# Altium PCB STM32Core.PcbDoc
Units mil, origin at the board's own origin, x right, y up, seen from the top; angles counter-clockwise.
Board outline 1090 x 1670 mil, 4 copper layers (Top1, Sign2, Gnd3, Bottom4), stack 42.312 mil thick; 69 components, 76 nets, 322 pads, 108 vias.
Unrouted connection lines stored in the file: 55.
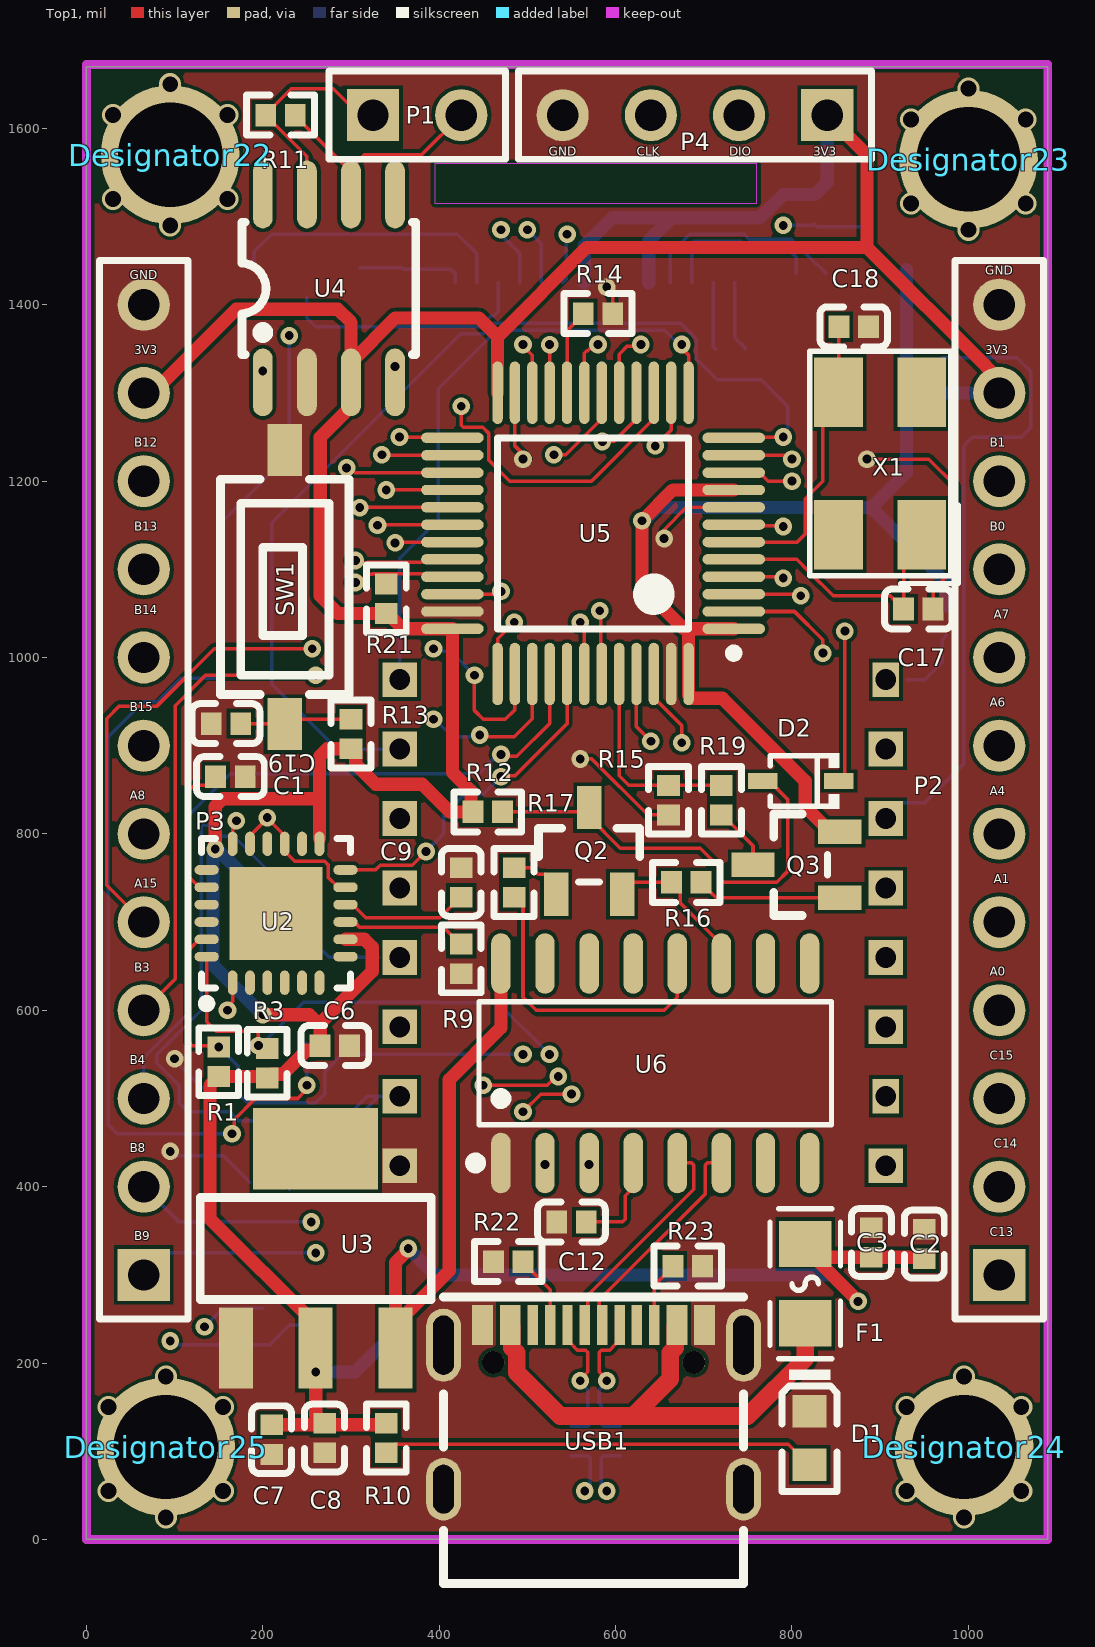
[diagram p0: Top1 view]
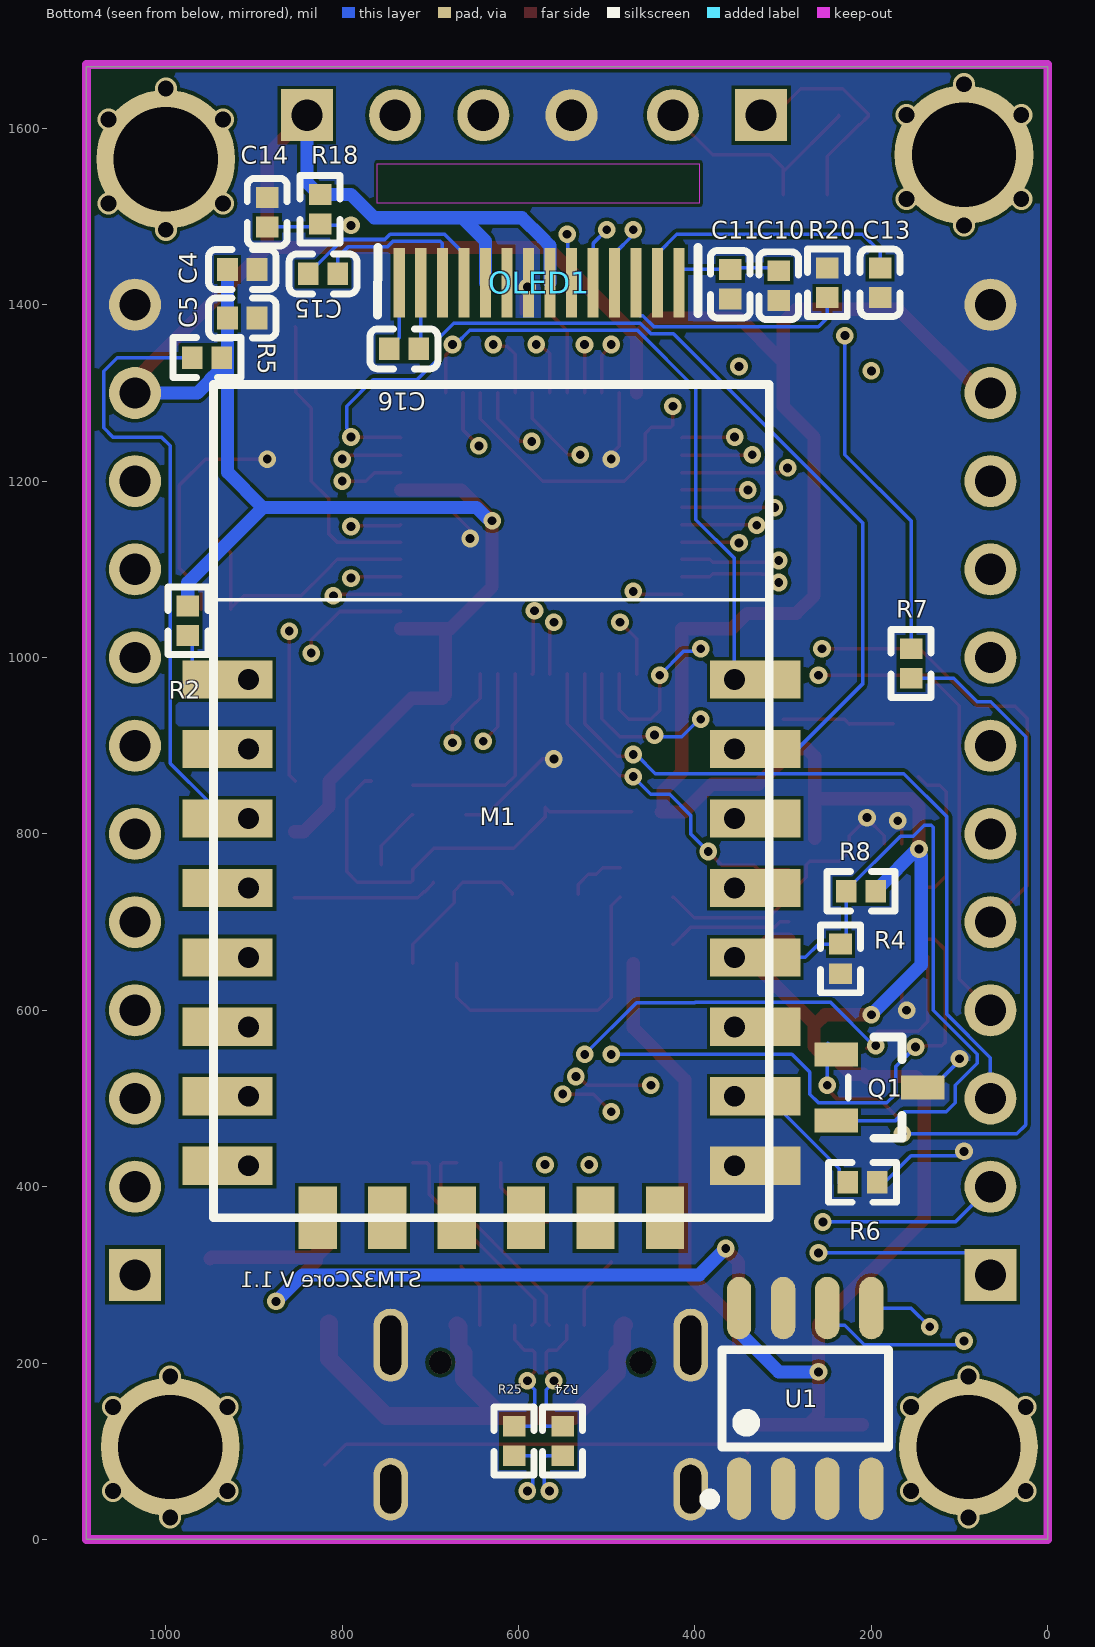
[diagram p1: Bottom4 view, seen from below]
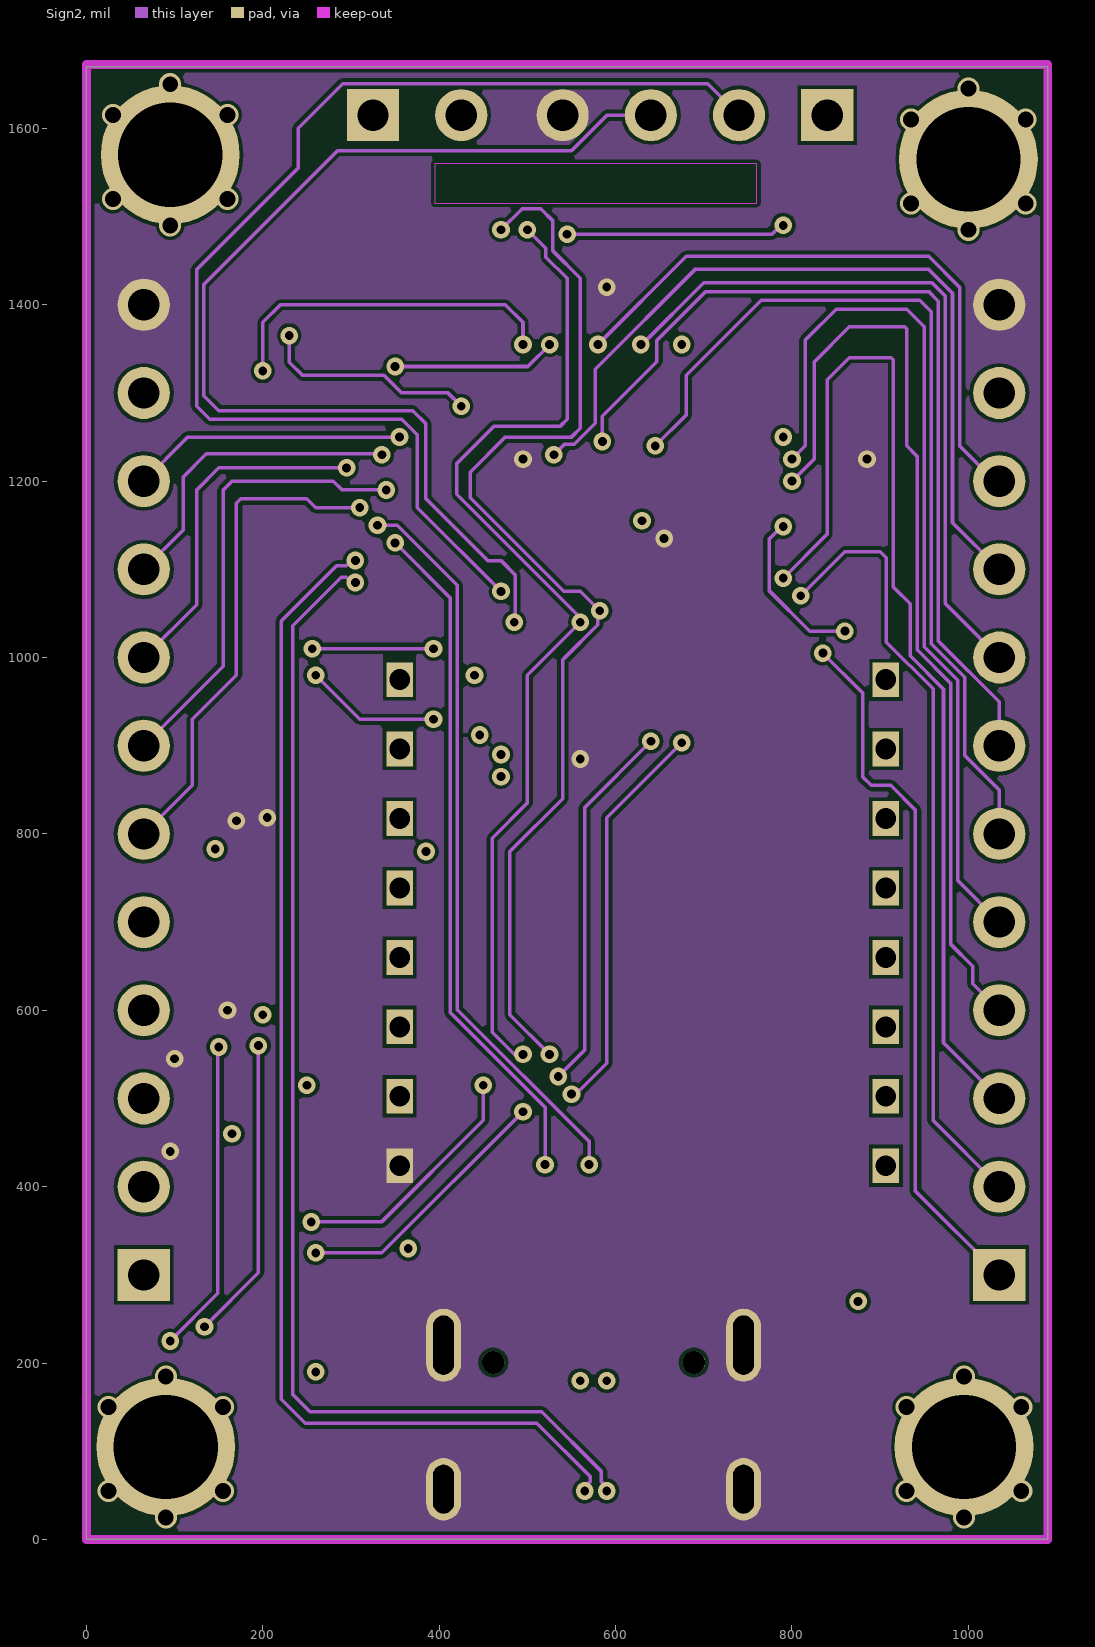
[diagram p2: Sign2]
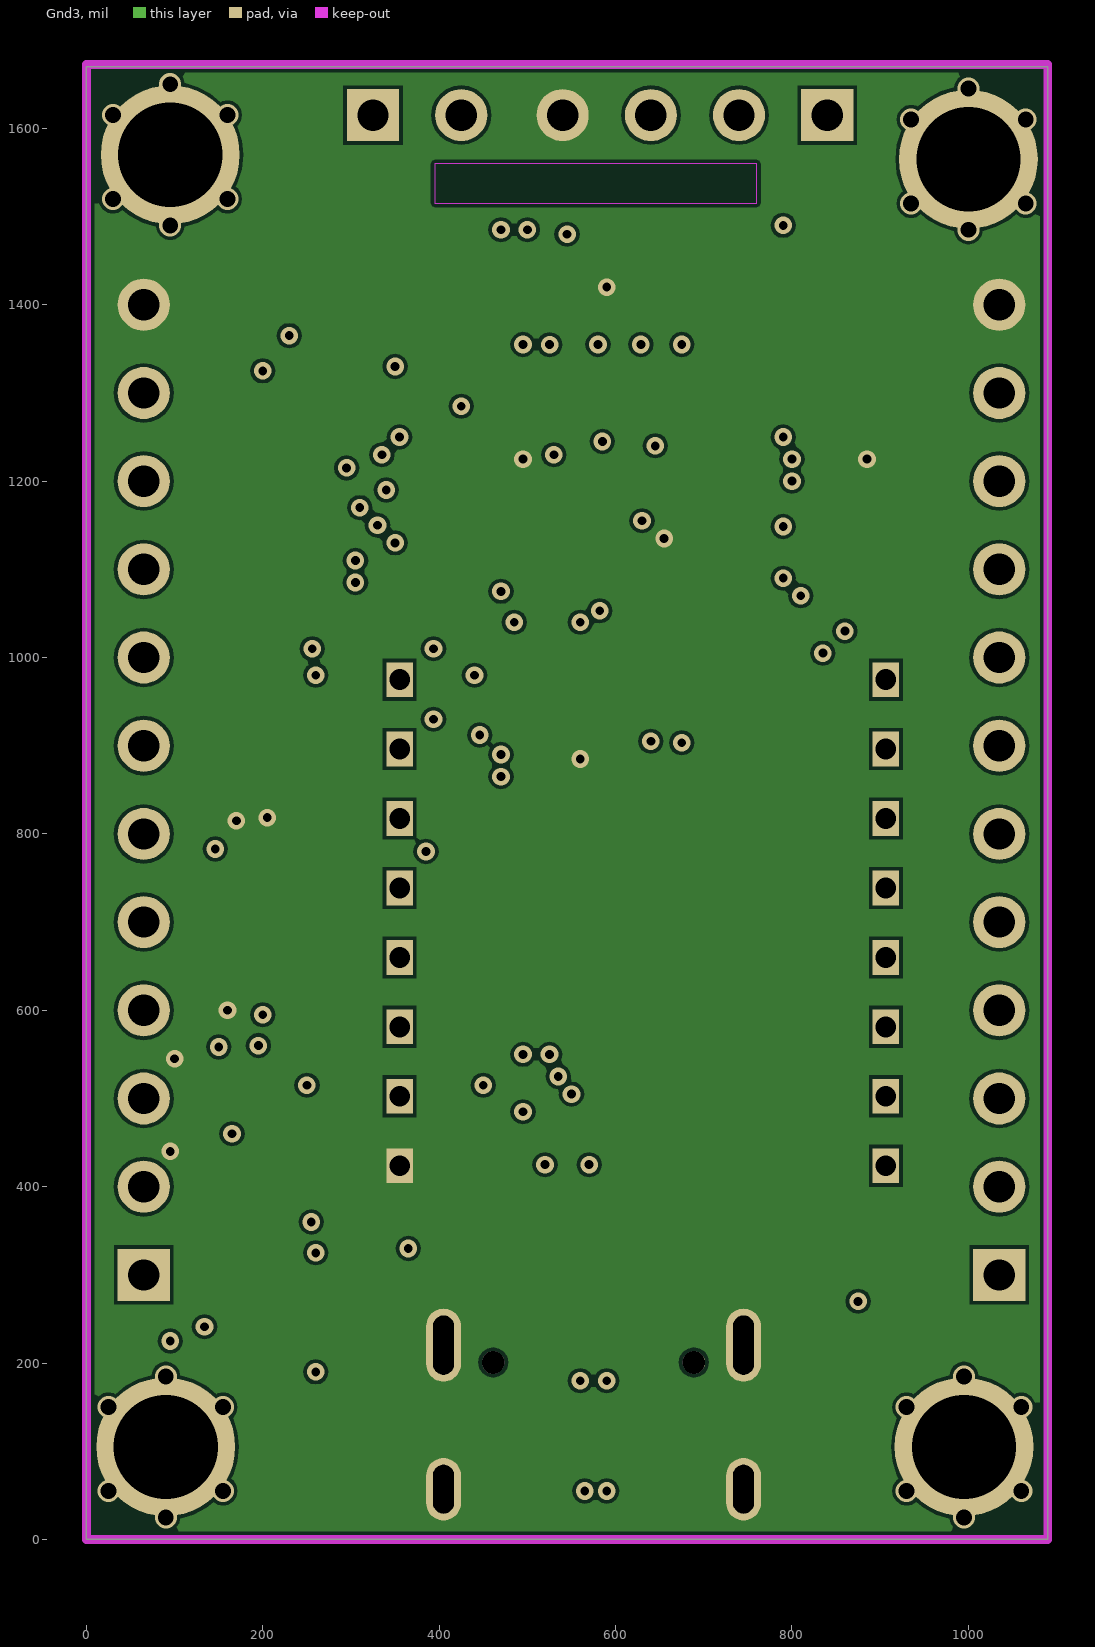
[diagram p3: Gnd3]

## Layer stack, top to bottom
Top Solder: solder mask 0.4, Solder Resist, Dk 3.5
Top1: signal copper 1.4
Dielectric 2: prepreg 12.252, PP-006, Dk 4.1
Sign2: signal copper 1.378
Dielectric 1: core 12.252, FR-4, Dk 4.2
Gnd3: signal copper 1.378
Dielectric 3: prepreg 12.252, PP-006, Dk 4.1
Bottom4: signal copper 1.4
Bottom Solder: solder mask 0.4, Solder Resist, Dk 3.5

## Board outline
0,0 0,1670 1090,1670 1090,0

## Design rules (kind name [scope] priority, off if disabled: settings)
Clearance [All] p1: gap=4 ignorepadtopadclearanceinfootprint=FALSE
ComponentClearance [All] p1: gap=0 collisioncheckmode=3 verticalgap=0 showdistances=FALSE
DiffPairsRouting [All] p1: maxlimit=9 minlimit=9 mostfreqgap=9 toplayer_minwidth=4 toplayer_maxwidth=4 toplayer_prefwidth=4 midlayer1_minwidth=4 midlayer1_maxwidth=4 midlayer1_prefwidth=4 midlayer2_minwidth=4 midlayer2_maxwidth=4 midlayer2_prefwidth=4 bottomlayer_minwidth=4 bottomlayer_maxwidth=4 bottomlayer_prefwidth=4 maxuncoupledlength=500
FanoutControl Fanout_BGA [All] p1: bgadir=Out bgaviamode=Centered fanoutstyle=Auto fanoutdirection=Alternating viagrid=1 // Fanout_BGA (Default Rule)
HoleSize [All] p1: absolutevalues=TRUE maxlimit=10000 minlimit=8 maxpercent=80.000 minpercent=20.000
MinimumSolderMaskSliver [All] p1 off: minsoldermaskwidth=2
PlaneClearance [All] p1: clearance=8
PlaneConnect [All] p1: planeconnectstyle=Direct reliefexpansion=20 reliefentries=4 reliefconductorwidth=10 reliefairgap=10
PolygonConnect [All] p1: connectstyle=Direct reliefconductorwidth=10 reliefentries=4 polygonreliefangle="90 Angle" airgapwidth=10
RoutingVias [All] p1: holewidth=8 width=16 viastyle="Through Hole" minholewidth=6 minwidth=12 maxholewidth=28 maxwidth=50
SilkToSilkClearance [All] p1: silktosilkclearance=0
SilkToSolderMaskClearance [IsPad] p1: minsilkscreentomaskgap=0 clearancetoexposedcopper=TRUE
SolderMaskExpansion [All] p1: expansion=3 istentingtop=FALSE
Width [All] p1: maxlimit=10000 minlimit=4 preferedwidth=4
21 further rules are at their usual default settings.

## Classes and differential pairs
component class main: C1 C2 C3 C4 C5 C6 C7 C8 C9 C10 C11 C12 C13 C14 C15 C16 C17 C18 C19 D1 D2 F1 M1 OLED1 P1 P2 P3 P4 Q1 Q2 Q3 R1 R2 R3 R4 R5 R6 R7 R8 R9 R10 R11 R12 R13 R14 R15 R16 R17 R18 R19 R20 R21 R22 R23 R24 R25 SW1 U2 U3 U4 U5 U6 USB1 X1
differential pair STM32IN: +STM32IN_P -STM32IN_N
differential pair STM32: +STM32_P -STM32_N
differential pair USB: +USB_P -USB_N

## Components (designator, comment, footprint, x,y, rotation, side; value= is the part's Value field where it differs from the comment)
C1 "2.2nF (222) 10% 50V" 0402_C 163.27,865 r0 top
C2 "10uF (106) 20% 6.3V" 0402_C 950,335 r270 top
C3 "100nF (104) 10% 16V" 0402_C 890,336.73 r270 top
C4 "10uF (106) 20% 6.3V" 0402_C 913.27,1440 r0 bottom
C5 "100nF (104) 10% 16V" 0402_C 913.27,1385 r0 bottom
C6 "2.2nF (222) 10% 50V" 0402_C 281.73,560 r180 top
C7 "100nF (104) 10% 16V" 0402_C 210,113.27 r90 top
C8 "10uF (106) 20% 6.3V" 0402_C 270,115 r90 top
C9 "0.1uF (105) 10% 25V" 0402_C 425,745 r270 top
C10 "100nF (104) 10% 16V" 0402_C 305,1421.73 r270 bottom
C11 "4.7uF (475) 20% 10V" 0402_C 360,1423.27 r270 bottom
C12 "100nF (104) 10% 16V" 0402_C 550,360 r180 top
C13 "2.2nF (222) 10% 50V" 0402_C 190,1425 r90 bottom
C14 "4.7uF (475) 20% 10V" 0402_C 885,1505 r270 bottom
C15 "1.0uF (105) 10% 25V" 0402_C 821.73,1435 r180 bottom
C16 "1.0uF (105) 10% 25V" 0402_C 730,1350 r0 bottom
C17 "20pF (200) 5% 50V" 0402_C 943.27,1055 r180 top
C18 "20pF (200) 5% 50V" 0402_C 870,1375 r180 top
C19 "100nF (104) 10% 16V" 0402_C 158.27,925 r0 top
D1 "白灯 0603" 0603_LED_S1 820,115 r270 top
D2 "1N4148WS T4" SOD-323_L1.8-W1.3-LS2.5-RD 810,860 r180 top
Designator22 "Comment" 铜柱 95,1570 r0 top
Designator23 "Comment" 铜柱 1000,1565 r0 top
Designator24 "Comment" 铜柱 995,105 r0 top
Designator25 "Comment" 铜柱 90,105 r0 top
F1 "ASMD0805-050" ASMD0805 815,290 r90 top
M1 "ESP-12E&F Module" "ESP-12E&F Module" 630.79,669.84 r180 bottom
OLED1 "QG-2832TLBFG02" OLED-SMD_QG-9616TSWCG02 576.61,1425.01 r270 bottom
P1 "Header 2" HDR1X2 325,1615 r0 top
P2 "Header 12" HDR1X12 1035,300 r90 top
P3 "Header 12" HDR1X12 65,300 r90 top
P4 "Header 4" HDR1X4 840,1615 r180 top
Q1 "SS8050 Y1" SOT-23(SOT-23-3) 190.79,512.4 r0 bottom
Q2 "SS8050 Y1" SOT-23(SOT-23-3) 570,780.79 r270 top
Q3 "SS8550 Y2" SOT-23(SOT-23-3) 805,765 r0 top
R1 "4.7KΩ (4701) ±1%" 0402_R 150,541.73 r90 top
R2 "10KΩ (1002) ±1%" 0402_R 975,1041.73 r270 bottom
R3 "4.7KΩ (4701) ±1%" 0402_R 205,540 r270 top
R4 "10KΩ (1002) ±1%" 0402_R 211.73,735 r180 bottom
R5 "10KΩ (1002) ±1%" 0402_R 953.27,1340 r0 bottom
R6 "10KΩ (1002) ±1%" 0402_R 210,405 r180 bottom
R7 "1KΩ (1001) ±1%" 0402_R 155,993.27 r90 bottom
R8 "0Ω (0R0) ±1%" 0402_R 235,658.27 r90 bottom
R9 "4.7KΩ (4701) ±1%" 0402_R 425,658.27 r270 top
R10 "1KΩ (1001) ±1%" 0402_R 340,115 r270 top
R11 "120Ω (1200) ±1%" 0402_R 220,1615 r0 top
R12 "10KΩ (1002) ±1%" 0402_R 455,825 r180 top
R13 "10KΩ (1002) ±1%" 0402_R 300,913.27 r270 top
R14 "10KΩ (1002) ±1%" 0402_R 580,1390 r0 top
R15 "10KΩ (1002) ±1%" 0402_R 660,838.27 r270 top
R16 "1KΩ (1001) ±1%" 0402_R 680,745 r0 top
R17 "1KΩ (1001) ±1%" 0402_R 485,745 r90 top
R18 "4.7KΩ (4701) ±1%" 0402_R 825,1508.27 r90 bottom
R19 "1KΩ (1001) ±1%" 0402_R 720,838.27 r270 top
R20 "5.6KΩ (5601) ±1%" 0402_R 250,1425 r90 bottom
R21 "1.5KΩ (1501) ±1%" 0402_R 340,1066.73 r90 top
R22 "5.1KΩ (5101) ±1%" 0402_R 478.27,315 r0 top
R23 "5.1KΩ (5101) ±1%" 0402_R 681.73,310 r180 top
R24 "22Ω (22R0) ±1%" 0402_R 550,111.73 r90 bottom
R25 "22Ω (22R0) ±1%" 0402_R 605,111.73 r90 bottom
SW1 "TS-1092S-B1D2-W" SW-SMD_L6.1-W3.6-LS7.9 225,1080 r90 top
U1 "M24C64-RMN6TP" SOIC-8_150mil 275,160 r180 bottom
U2 "MPU-6050" QFN-24_4x4x05P 215,710 r0 top
U3 "AMS1117-3.3_C369933" SOT-223-AMS1117 260,330 r270 top
U4 "TJA1042T/1J" SOIC-8_L5.0-W4.0-P1.27-LS6.0-BL 275,1418.5 r0 top
U5 "STM32F103CBT6" STM-LQFP48_N 574.45,1140.79 r180 top
U6 "CH340" SOP-16_L10.0 645,540 r0 top
USB1 "TYPE-C16PIN" TYPE-C-SMD 575,150 r0 top
X1 "8MHZ" OSC-SMD_4P-L5.0-W3.2-BL 900,1220 r90 top

## Footprints (in the part's own frame and the unit in brackets; to place one, negate y for a bottom-side part, rotate by r counter-clockwise, add the part's x,y. Pads: shape width x height; smd on the part's side, far side on the other; paste and mask are expansions set on the pad)
0402_C [mm]
  rect 0.6x0.65 smd mask+0.051: 1(-0.425,0) 2(0.425,0)
  silkscreen extent -0.97,-0.58 0.97,0.58, body extent -0.48,-0.3 0.52,0.3, height 0.2
0402_R [mm]
  rect 0.6x0.65 smd mask+0.051: 1(-0.425,0) 2(0.425,0)
  silkscreen extent -0.97,-0.58 0.97,0.58, body extent -0.57,-0.27 0.58,0.28, height 0.41
0603_LED_S1 [mm]
  rect 0.93x0.98 smd: A(0.77,0) K(-0.77,0)
  silkscreen extent -1.98,-0.79 1.54,0.79, body extent -0.8,-0.4 0.8,0.4, height 0.6
ASMD0805 [mm]
  rect 1.335x1.5 smd: 1(-1.142,0) 2(1.142,0)
  silkscreen extent -2.16,-1.02 2.16,1.02, body extent -1.03,-0.69 1.07,0.71, height 0.83
"ESP-12E&F Module" [mm]
  rect 2.6x1.1 smd: 1(-7.6,7.75) 2(-7.6,5.75) 3(-7.6,3.75) 4(-7.6,1.75) 5(-7.6,-0.25) 6(-7.6,-2.25) 7(-7.6,-4.25) 8(-7.6,-6.25) 15(7.6,-6.25) 16(7.6,-4.25) 17(7.6,-2.25) 18(7.6,-0.25) 19(7.6,1.75) 20(7.6,3.75) 21(7.6,5.75) 22(7.6,7.75)
  rect 0.762x1 hole 0.6: 1(-7,7.75) 7(-7,-4.25)
  rect 0.762x1 / inner rect 0.762x1 / far side rect 1x1 hole 0.6: 2(-7,5.75) 3(-7,3.75) 4(-7,1.75) 5(-7,-0.25) 6(-7,-2.25) 8(-7,-6.25) 15(7,-6.25) 16(7,-4.25) 17(7,-2.25) 18(7,-0.25) 19(7,1.75) 20(7,3.75) 21(7,5.75) 22(7,7.75)
  rect 1.1x1.8 smd: 9(-5,-7.75) 10(-3,-7.75) 11(-1,-7.75) 12(1,-7.75) 13(3,-7.75) 14(5,-7.75)
  silkscreen extent -8,-7.75 8,16.25
HDR1X2 [mm] "Connector; Header; 2 Position"
  rect 1.5x1.5 hole 0.9: 1(0,0)
  round 1.5 hole 0.9: 2(2.54,0)
  silkscreen extent -1.27,-1.27 3.81,1.27
HDR1X4 [mm] "Connector; Header; 4 Position"
  rect 1.5x1.5 hole 0.9: 1(0,0)
  round 1.5 hole 0.9: 2(2.54,0) 3(5.08,0) 4(7.62,0)
  silkscreen extent -1.27,-1.27 8.89,1.27
HDR1X12 [mm] "Connector; Header; 12 Position"
  rect 1.5x1.5 hole 0.9: 1(0,0)
  round 1.5 hole 0.9: 2(2.54,0) 3(5.08,0) 4(7.62,0) 5(10.16,0) 6(12.7,0) 7(15.24,0) 8(17.78,0) 9(20.32,0) 10(22.86,0) 11(25.4,0) 12(27.94,0)
  silkscreen extent -1.27,-1.27 29.21,1.27
OLED-SMD_QG-9616TSWCG02 [mm]
  rect 2x0.32 smd: 1(0,-4.03) 2(0,-3.41) 3(0,-2.79) 4(0,-2.17) 5(0,-1.55) 6(0,-0.93) 7(0,-0.31) 8(0,0.31) 9(0,0.93) 10(0,1.55) 11(0,2.17) 12(0,2.79) 13(0,3.409) 14(0,4.03)
  silkscreen extent -1.02,-4.65 0.93,4.57, body extent -35.87,-4.51 0.93,4.49, height 1.27
OSC-SMD_4P-L5.0-W3.2-BL [mil]
  rect 78.7x55.1 smd mask+2: 1(-80.7,-47.2) 2(80.7,-47.2) 3(80.7,47.2) 4(-80.7,47.2)
  silkscreen extent -136,-89 127,80
QFN-24_4x4x05P [mm]
  rect 2.68x2.68 smd mask+0.051: 0(0,0)
  oval 0.28x0.7 smd mask+0.051: 1(-1.25,-2) 2(-0.75,-2) 3(-0.25,-2) 4(0.25,-2) 5(0.75,-2) 6(1.25,-2) 13(1.25,2) 14(0.75,2) 15(0.25,2) 16(-0.25,2) 17(-0.75,2) 18(-1.25,2)
  oval 0.7x0.28 smd mask+0.051: 7(2,-1.25) 8(2,-0.75) 9(2,-0.25) 10(2,0.25) 11(2,0.75) 12(2,1.25) 19(-2,1.25) 20(-2,0.75) 21(-2,0.25) 22(-2,-0.25) 23(-2,-0.75) 24(-2,-1.25)
  silkscreen extent -2.15,-2.72 2.15,2.15
SOD-323_L1.8-W1.3-LS2.5-RD [mm]
  rect 0.845x0.455 smd: 1(-1.098,0) 2(1.098,0)
  silkscreen extent -1.1,-0.8 0.88,0.8
SOIC-8_150mil [mm]
  oval 0.7x1.8 smd: 1(-1.905,-2.6) 2(-0.635,-2.6) 3(0.635,-2.6) 4(1.905,-2.6) 5(1.905,2.6) 6(0.635,2.6) 7(-0.635,2.6) 8(-1.905,2.6)
  silkscreen extent -2.9,-3.05 2.4,1.4
SOIC-8_L5.0-W4.0-P1.27-LS6.0-BL [mil]
  oval 22.38x76.78 smd: 1(-75,-106.5) 2(-25,-106.5) 3(25,-106.5) 4(75,-106.5) 5(75,106.5) 6(25,106.5) 7(-25,106.5) 8(-75,106.5)
  silkscreen extent -98,-75 98,75
SOP-16_L10.0 [mil]
  oval 22x68.7 smd mask+2: 1(-175,-113.1) 2(-125,-113.1) 3(-75,-113.1) 4(-25,-113.1) 5(25,-113.1) 6(75,-113.1) 7(125,-113.1) 8(175,-113.1) 9(175,113.1) 10(125,113.1) 11(75,113.1) 12(25,113.1) 13(-25,113.1) 14(-75,113.1) 15(-125,113.1) 16(-175,113.1)
  silkscreen extent -210,-119 200,70, body extent -196,-124 198,117, height 69
SOT-23(SOT-23-3) [mm]
  rect 1.25x0.7 smd: 1(1.25,-0.95) 2(1.25,0.95) 3(-1.25,0)
  silkscreen extent -0.65,-1.46 0.9,1.46, body extent -1.5,-1.5 1.5,1.5, height 1.3
SOT-223-AMS1117 [mm]
  rect 2.34x0.98 smd: 1(2.87,-2.3) 2(2.87,0) 3(2.87,2.3)
  rect 2.34x3.6 smd: 4(-2.87,0)
  silkscreen extent -1.47,-3.33 1.47,3.33, body extent -3.47,-3.25 3.53,3.25, height 1.9
STM-LQFP48_N [mm] "QFP, 48-Leads, Body 7x7mm, Pitch 0.5mm, IPC Medium Density"
  oval 1.8x0.3 smd: 1(-4.05,2.75) 2(-4.05,2.25) 3(-4.05,1.75) 4(-4.05,1.25) 5(-4.05,0.75) 6(-4.05,0.25) 7(-4.05,-0.25) 8(-4.05,-0.75) 9(-4.05,-1.25) 10(-4.05,-1.75) 11(-4.05,-2.25) 12(-4.05,-2.75) 25(4.05,-2.75) 26(4.05,-2.25) 27(4.05,-1.75) 28(4.05,-1.25) 29(4.05,-0.75) 30(4.05,-0.25) 31(4.05,0.25) 32(4.05,0.75) 33(4.05,1.25) 34(4.05,1.75) 35(4.05,2.25) 36(4.05,2.75)
  oval 0.3x1.8 smd: 13(-2.75,-4.05) 14(-2.25,-4.05) 15(-1.75,-4.05) 16(-1.25,-4.05) 17(-0.75,-4.05) 18(-0.25,-4.05) 19(0.25,-4.05) 20(0.75,-4.05) 21(1.25,-4.05) 22(1.75,-4.05) 23(2.25,-4.05) 24(2.75,-4.05) 37(2.75,4.05) 38(2.25,4.05) 39(1.75,4.05) 40(1.25,4.05) 41(0.75,4.05) 42(0.25,4.05) 43(-0.25,4.05) 44(-0.75,4.05) 45(-1.25,4.05) 46(-1.75,4.05) 47(-2.25,4.05) 48(-2.75,4.05)
  silkscreen extent -4.18,-2.75 2.75,3.57, body extent -3.5,-3.5 3.5,3.5, height 1.6
SW-SMD_L6.1-W3.6-LS7.9 [mm]
  rect 1.5x1 smd: 1(-3.95,0) 2(3.95,0)
  silkscreen extent -3.1,-1.85 3.1,1.85
TYPE-C-SMD [mm]
  oval 1x2.1 hole 0.6 slot 1.7 at 90 deg: 1(-4.32,1.787) 2(4.32,1.787)
  oval 1x1.8 hole 0.6 slot 1.4 at 90 deg: 3(-4.32,-2.362) 4(4.32,-2.362)
  rect 0.6x1.15 smd: A1B12(-3.2,2.362) A4B9(-2.4,2.362) B1A12(3.2,2.362) B4A9(2.4,2.362)
  rect 0.3x1.15 smd: A5(-1.25,2.362) A6(-0.25,2.362) A7(0.25,2.362) A8(-1.75,2.362) B5(1.75,2.362) B6(0.75,2.362) B7(-0.75,2.362) B8(1.25,2.362)
  round 0.65 hole 0.65 unplated: ""(-2.89,1.288) ""(2.89,1.288)
  silkscreen extent -4.32,-5.08 4.32,3.17, body extent -4.7,-5.22 4.24,2.68, height 1.61
铜柱 [mm]
  round 4 hole 3: 1(0,0)

## Part data
C1 C6 C13: library part "0402 2.2nF (222) 10% 50V", "贴片电容", Package=0402, SuppliersPartNumber=C1531, ComponentLink1Description=供应商链接, ComponentLink1URL=http://www.szlcsc.com/product/details_1883.html, Supplier=LC
C2 C4 C8: library part "0402 10uF (106) 20% 6.3V", "贴片电容", Package=0402, SuppliersPartNumber=C15525, ComponentLink1Description=供应商链接, ComponentLink1URL=http://www.szlcsc.com/product/details_16204.html, Supplier=LC
C3 C5 C7 C10 C12 C19: library part "0402 100nF (104) 10% 16V", "贴片电容", Package=0402, SuppliersPartNumber=C1525, ComponentLink1Description=供应商链接, ComponentLink1URL=http://www.szlcsc.com/product/details_1877.html, Supplier=LC
C9 C15 C16: library part "0402 1.0uF (105) 10% 25V", "贴片电容", Package=0402, SuppliersPartNumber=C52923, ComponentLink1Description=供应商链接, ComponentLink1URL=http://www.szlcsc.com/product/details_53938.html, Supplier=LC
C11 C14: library part "0402 4.7uF (475) 20% 10V", "贴片电容", Package=0402, SuppliersPartNumber=C23733, ComponentLink1Description=供应商链接, ComponentLink1URL=http://www.szlcsc.com/product/details_24469.html, Supplier=LC
C17 C18: library part "0402 20pF (200) 5% 50V", "贴片电容", Package=0402, SuppliersPartNumber=C1554, ComponentLink1Description=供应商链接, ComponentLink1URL=http://www.szlcsc.com/product/details_1906.html, Supplier=LC
D1: library part "0603 白灯", "发光二极管", Package=0603, SuppliersPartNumber=C2290, ComponentLink1Description=供应商链接, ComponentLink1URL=http://www.szlcsc.com/product/details_2663.html, Supplier=LC
D2: library part "SOD-323 1N4148WS T4", "二极管", Package=SOD-323, SuppliersPartNumber=C2128, ComponentLink1Description=供应商链接, ComponentLink1URL=http://www.szlcsc.com/product/details_2485.html, Supplier=LC
F1: BOM_JLCPCB Part Class="Extended Part", BOM_Manufacturer=JDTFUSE, BOM_Manufacturer Part=ASMD0805-050, BOM_Supplier=LCSC, BOM_Supplier Part=C135329, Contributor=LCSC, spicePre=F, spiceSymbolName=ASMD0805-050
OLED1: library part OLED, BOM_JLCPCB Part Class="Extended Part", BOM_Manufacturer=Allvision, BOM_Manufacturer Part=QG-2832TLBFG02, BOM_Supplier=LCSC, BOM_Supplier Part=C91220, Contributor=LCSC, spicePre=O, spiceSymbolName=QG-2832TLBFG02
P1: "Header, 2-Pin", LatestRevisionDate=17-Jul-2002, LatestRevisionNote="Re-released for DXP Platform.", Publisher="Altium Limited"
P2 P3: "Header, 12-Pin", LatestRevisionDate=17-Jul-2002, LatestRevisionNote="Re-released for DXP Platform.", Publisher="Altium Limited"
P4: "Header, 4-Pin", LatestRevisionDate=17-Jul-2002, LatestRevisionNote="Re-released for DXP Platform.", Publisher="Altium Limited"
Q1 Q2: library part "SOT-23 SS8050 Y1", "三极管", Package=SOT-23, SuppliersPartNumber=C2150, ComponentLink1Description=供应商链接, ComponentLink1URL=http://www.szlcsc.com/product/details_2507.html, Supplier=LC
Q3: library part "SOT-23 SS8550 Y2", "三极管", Package=SOT-23, SuppliersPartNumber=C8542, ComponentLink1Description=供应商链接, ComponentLink1URL=http://www.szlcsc.com/product/details_9037.html, Supplier=LC
R1 R3 R9 R18: library part "0402 4.7KΩ (4701) 1%", "贴片电阻", Package=0402, SuppliersPartNumber=C25900, ComponentLink1Description=供应商链接, ComponentLink1URL=http://www.szlcsc.com/product/details_26643.html, Supplier=LC
R2 R4 R5 R6 R12 R13 R14 R15: library part "0402 10KΩ (1002) 1%", "贴片电阻", Package=0402, SuppliersPartNumber=C25744, ComponentLink1Description=供应商链接, ComponentLink1URL=http://www.szlcsc.com/product/details_26487.html, Supplier=LC
R7 R10 R16 R17 R19: library part "0402 1KΩ (1001) 1%", "贴片电阻", Package=0402, SuppliersPartNumber=C11702, ComponentLink1Description=供应商链接, ComponentLink1URL=http://www.szlcsc.com/product/details_12256.html, Supplier=LC
R8: library part "0402 0Ω (0R0) 1%", "贴片电阻", Package=0402, SuppliersPartNumber=C17168, ComponentLink1Description=供应商链接, ComponentLink1URL=http://www.szlcsc.com/product/details_17853.html, Supplier=LC
R11: library part "0402 120Ω (1200) 1%", "贴片电阻", Package=0402, SuppliersPartNumber=C25079, ComponentLink1Description=供应商链接, ComponentLink1URL=http://www.szlcsc.com/product/details_25822.html, Supplier=LC
R20: library part "0402 5.6KΩ (5601) 1%", "贴片电阻", Package=0402, SuppliersPartNumber=C25908, ComponentLink1Description=供应商链接, ComponentLink1URL=http://www.szlcsc.com/product/details_26651.html, Supplier=LC
R21: library part "0402 1.5KΩ (1501) 1%", "贴片电阻", Package=0402, SuppliersPartNumber=C25867, ComponentLink1Description=供应商链接, ComponentLink1URL=http://www.szlcsc.com/product/details_26610.html, Supplier=LC
R22 R23: library part "0402 5.1KΩ (5101) 1%", "贴片电阻", Package=0402, SuppliersPartNumber=C25905, ComponentLink1Description=供应商链接, ComponentLink1URL=http://www.szlcsc.com/product/details_26648.html, Supplier=LC
R24 R25: library part "0402 22Ω (22R0) 1%", "贴片电阻", Package=0402, SuppliersPartNumber=C25092, ComponentLink1Description=供应商链接, ComponentLink1URL=http://www.szlcsc.com/product/details_25835.html, Supplier=LC
SW1: "触控开关", BOM_JLCPCB Part Class="Extended Part", BOM_Manufacturer=Yuandi(台湾元迪), BOM_Manufacturer Part=TS-1092S-B1D2-W, BOM_Supplier=LCSC, BOM_Supplier Part=C782859, Contributor=LCSC, spicePre=S, spiceSymbolName=TS-1092S-B1D2-W
U1: "EEPROM", Package=SOIC-8_150mil, SuppliersPartNumber=C79988, ComponentLink1Description=供应商链接, ComponentLink1URL=http://www.szlcsc.com/product/details_81133.html, Supplier=LC
U2: "传感器", Package=QFN-24_4x4x05P, SuppliersPartNumber=C24112, ComponentLink1Description=供应商链接, ComponentLink1URL=http://www.szlcsc.com/product/details_24852.html, Supplier=LC
U3: library part AMS1117-3.3, BOM_Manufacturer=KEXIN, BOM_Manufacturer Part=AMS1117-3.3, BOM_Paste Type=expand, BOM_Supplier=LCSC, BOM_Supplier Part=C369933, Contributor=LCSC, spicePre=U, spiceSymbolName=AMS1117-3.3_C369933
U4: "CAN芯片", BOM_JLCPCB Part Class="Extended Part", BOM_Manufacturer=NXP, BOM_Manufacturer Part=TJA1042T/1J, BOM_Supplier=LCSC, BOM_Supplier Part=C53670, spicePre=U, spiceSymbolName=TJA1042T/1J
U5: "ARM Cortex-M3 32-bit MCU, 128 KB Flash, 20 KB Internal RAM, 37 I/Os, 48-pin LQFP, -40 to 85 degC, Tray", I/Os (High Current)=37, Operating Frequency(F) (Processor speed) (MHz)=72, Supplier Part Number 1=497-6288-ND, Supply Voltage(Vcc) min (V)=2, A/D Converter="2x12-bit (10 Channel)", ComponentLink1Description="Manufacturer URL", ComponentLink1URL=http://www.st.com/web/en/home.html, ComponentLink2Description=Datasheet, ComponentLink2URL=http://www.st.com/st-web-ui/static/active/en/resource/technical/document/datasheet/CD00161566.pdf, ComponentLink3Description="Package Specification", ComponentLink3URL=http://www.st.com/st-web-ui/static/active/en/resource/technical/document/datasheet/DM00058181.pdf, Core="ARM Cortex-M3", DatasheetVersion="Rev. 16", FLASH Size (Prog) (kB)=128, Internal RAM Size (kB)=20, Mounting Technology="Surface Mount", PackageDescription="48-Pin Low Profile Quad Flat Package, 7 x 7 mm Body, 0.5 mm Pitch", PackageReference=LQFP48, PackageVersion="Rev. 6, 06/2013", Packing=Tray, PartNumber=STM32F103CBT6, Supplier 1=Digi-Key, Supplier 2=Farnell, Supplier 3=Newark, Supplier 4=Newark, Supplier 5=Mouser, Supplier Part Number 2=1606327, Supplier Part Number 3=11N8296, Supplier Part Number 4=57P1214, Supplier Part Number 5=511-STM32F103CBT6
U6: "USB to serial", Package=SOIC-16_150mil, SuppliersPartNumber=C14267, ComponentLink1Description=供应商链接, ComponentLink1URL=http://www.szlcsc.com/product/details_14927.html, Supplier=LC
USB1: Current Rating - Power (Max)=3A, JLCPCB Part Class="Extended Part", LCSC Part Name="Type-C 母座 卧贴 快充闪充 停产", Manufacturer="SHOU HAN(首韩)", Operating Temperature Range=-40~+85, Add into BOM=yes, Connector Type=Type-C, Convert to PCB=yes, Datasheet=https://atta.szlcsc.com/upload/public/pdf/source/20190521/C393939_7B9043D4CF1026AF443AB60D91FBCD5C.pdf, Device=TYPE-C16PIN, Gender=母座, Manufacturer Part=TYPE-C16PIN, Mounting Style=卧贴, Number of Contacts=16, Number of Ports=1, Standard=-, Supplier=LCSC, Supplier Footprint=SMD, Supplier Part=C393939, Symbol=TYPE-C16PIN
X1: "8M 30PPM 20pf", Frequency Stability=-, JLCPCB Part Class="Extended Part", LCSC Part Name="8MHz 20pF 20PPM", Manufacturer=SIWARD(台湾希华), Manufacturer Part=XTL541200-C282-030, Add into BOM=yes, Convert to PCB=yes, Crystal Type=-, Datasheet=https://atta.szlcsc.com/upload/public/pdf/source/20180502/C211359_C3A699E12D7D0972204A7F7616890513.pdf, Device=XTL541200-C282-030, Frequency Tolerance=-, Load Capacitance=-, Operating Temperature=-, Supplier=LCSC, Supplier Footprint=SMD5032-4P, Supplier Part=C211359, Symbol=XTL541200-C282-030

## Via types
v1: diameter 20, hole 10, Top1 to Bottom4, 84 vias
v2: diameter 25, hole 18, Top1 to Bottom4, 24 vias

## Nets (pads, with @x,y where several pads share a name; then routed paths per layer and width w, separated by ;. In a path a pad name is that pad's centre, name@x,y a point inside that pad or via, vN(x,y) a via of type N, cw(c..) or ccw(c..) an arc to the next point about the centre after c; other vN are vias at no path point)
3V3: C4.2 C5.2 C6.2 C7.2 C8.2 OLED1.5 OLED1.8 P2.11 P3.11 P4.1 Q3.2 R1.1 R2.1 R3.2 R4.2 R5.1 R10.1 R12.2 R13.2 R18.2 R21.1 U1.8 U2.8 U2.13 U3.2 U4.3 U5.1 U5.9 U5.24 U5.36 U5.48 | length 5928
  Top1 w15: P3.11 75,1300 170,1395 285,1395 300,1380 U4.3@300,1335 ; v1(146,782.9) 146,831.21 154.79,840 264.21,840 ; v1(200,595) 252.53,595 264.02,583.51 265,583.51 C6.2 265,559.02 260.69,554.7 249.7,554.7 222.58,527.58 209.31,527.58 R3.2 203.27,525 R1.1 149.81,525 140,515.19 140,363.78 260,243.78 U3.2 v1(260,190) 260,141.54 269.81,131.73 C8.2 ; C7.2 338.27,130 R10.1 ; U2.13@264.21,795.02 264.21,840 ; 265.71,585.71 324.01,644.01 324.01,671.69 315.22,680.47 U2.8 ; R21.1 285,1050 265,1070 265,1249.8 300,1284.8 U4.3 U4.3@300,1335 ; R21.1@340.98,1050 358.46,1032.52 U5.36 415,870 435.92,849.08 435.92,827.35 R12.2 412.04,825 380.79,856.25 328.09,856.25 305.3,879.04 305.3,892.22 300.98,896.54 R13.2 273,896.54 264.21,887.75 264.21,840 ; U5.24 466.18,1363.82 ; U5.1 687.95,1032.52 ; U5.9 665,1190 v1(630,1155) 630,1080 677.48,1032.52 687.95,1032.52 ; P4.1 885,1570 885,1465 ; Q3.2 843.39,802.4 815,830.79 815,860 721.19,953.81 686.32,953.81 682.72,957.42 U5.48 682.72,1027.28 687.95,1032.52 ; P2.11 1035,1314.9 1020,1329.9 1020,1330 885,1465 ; U4.3@300,1335 350,1385 445,1385 466.18,1363.82 ; 466.18,1363.82 567.36,1465 885,1465
  Bottom4 w15: v1@143.5,775 143.5,651.5 v1(200,595) ; v1(146,782.9) 146.96,781.95 149.04,781.95 190.69,740.3 190.69,739.31 R4.2 ; v1(260,190) 305,190 350,235 U1.8 ; OLED1.8 564.41,1467.08 573.2,1475.87 573.36,1475.87 596.17,1498.68 663.96,1498.68 ; v1(630,1155) 631.35,1155 633.85,1157.5 635.13,1157.5 647.63,1170 890,1170 ; OLED1.5 637.64,1472.36 663.96,1498.68 ; P4.1 840,1539.02 825.98,1525 R18.2 790,1525 763.68,1498.68 663.96,1498.68 ; C4.2 C5.2 R5.1@930,1334.02 ; 950,1315 940.8,1324.2 939.81,1324.2 ; R2.1 975,1085 890,1170 ; P2.11 964.02,1300 939.81,1324.2 ; 890,1170 930,1210 R5.1@930,1334.02 ; R5.1@930,1334.02 939.81,1324.2
5VD: C2.2 C3.2 F1.2 U3.3 U6.16 | length 1351.9
  Top1 w15: U3.3 U3.3@350.55,243.78 ; v1(365,330) 365,328.65 350.55,314.2 U3.3@350.55,243.78 ; U6.16 470,580 411.42,521.42 411.42,304.65 U3.3@350.55,243.78 ; F1.2@829.11,315.89 v1(875,270) ; F1.2@833.23,320 818.25,334.98 F1.2 F1.2@829.98,320 ; F1.2@835.63,314.35 F1.2@829.98,320 ; C2.2 948.27,320 F1.2@829.98,320
  Bottom4 w15: v1(365,330) 395,300 845,300 v1(875,270)
BOOT0: R15.1 R19.1 U5.44 | length 235.9
  Top1 w4: U5.44 603.98,866.02 615,855 R15.1 R19.1
BOOT1: R14.1 U5.20 | length 97.4
  Top1 w4: U5.20 544.92,1370.67 563.27,1389.02 R14.1
CAN_H: P1.1 R11.1 U4.7 | length 242.1
  Top1 w4: U4.7 250,1568.27 214.06,1604.2 213.08,1604.2 203.27,1614.02 R11.1 203.27,1615.98 232.28,1645 280,1645 P1.1@310,1615
CAN_L: P1.2 R11.2 U4.6 | length 270.3
  Top1 w4: R11.2 236.73,1614.02 U4.6@300,1550.75 ; U4.6 300,1541.71 U4.6@300,1550.75 ; P1.2 380,1570 315,1570 300,1555 U4.6@300,1550.75
CAN_Rx: U4.4 U5.21 | length 240.4
  Top1 w4: v1@525,1355 v1(525.24,1354.76) U5.21
  Sign2 w4: v1(350,1330) 500.47,1330 v1(525.24,1354.76)
CAN_Tx: U4.1 U5.22 | length 450.7
  Top1 w4: v1(495,1355) 495,1353.47 505.55,1342.92 U5.22
  Sign2 w4: v1(200,1325) 200,1380 220,1400 475,1400 495,1380 v1(495,1355)
CH340_RXD: U5.30 U6.3 | length 922.9
  Top1 w4: v1(330,1150) 330.31,1150.31 414.68,1150.31 U5.30
  Sign2 w4: v1(330,1150) 352.63,1150 420.5,1082.13 420.5,600.81 570,451.31 v1(570,425)
CH340_TXD: U5.31 U6.2 | length 840.8
  Top1 w4: v1(350,1130) 350.94,1130.94 U5.31
  Sign2 w4: v1(350,1130) 412.5,1067.5 412.5,597.5 520,490 v1(520,425)
ESP12_BOOT: R7.2 U5.15 | length 974.7
  Top1 w4: v1(425,1285) 425,1263.3 427.34,1260.96 449.46,1260.96 456.43,1253.99 456.43,1223.57 480,1200 572.64,1200 643.35,1270.71 U5.15
  Sign2 w4: v1(230,1365) 230,1335 245,1320 337.37,1320 357.37,1300 410,1300 v1(425,1285)
  Bottom4 w4: R7.2 155,1154.91 230,1229.91 v1(230,1365)
ESP12_RXD: M1.21 U5.12 | length 1184.9
  Top1 w4: U5.12 734.37,1249.53 789.53,1249.53 v1(790,1250)
  Bottom4 w4: M1.21@355.2,896.22 331.57,896.22 283.78,896.22 210,970 210,1152.63 424.37,1367 449.84,1367 461.84,1379 673.63,1379 691.24,1361.38 691.24,1338.93 715.18,1315 765,1315 795,1285 795,1260 v1@785,1250
ESP12_TXD: M1.22 U5.13 | length 716
  Top1 w4: v1(675,1355) 675,1350.67 682.72,1342.95 U5.13
  Bottom4 w4: M1.22@355.2,974.96 355.2,1112.57 399,1156.37 399,1304.85 465.15,1371 655.54,1371 671.54,1355 v1(675,1355)
GND: C1.2 C2.1 C3.1 C4.1 C5.1 C6.1 C7.1 C8.1 C9.1 C10.2 C11.2 C12.2 C13.1 C14.1 C17.1 C18.1 C19.1 D1.K M1.15 OLED1.7 P2.12 P3.12 P4.4 Q1.3 R6.2 R8.1 R9.2 R14.2 R15.2 R20.2 R22.1 R23.1 SW1.2 U1.1 U1.2 U1.3 U1.4 U1.7 U2.1 U2.11 U2.15 U2.17 U2.18 U3.1 U4.2 U5.8 U5.23 U5.35 U5.47 U6.1 USB1.1 USB1.2 USB1.3 USB1.4 USB1.A1B12 USB1.B1A12 | length 1001.8
  Top1 w4: v1(160,600) 160,604.33 165.79,610.12 U2.1 ; U2.18 165.79,810.79 v1(170,815) ; U2.17 185.47,797.99 205,817.52 v1@205,817.68 ; v1(205,818.5) v1@205,817.68 ; U2.11 285.47,739.53 273.96,751.04 273.96,765.04 270.04,768.96 236.35,768.96 224.84,780.47 U2.15 224.84,797.83 v1@205,817.68 ; U5.23 485.87,1239.78 v1@500.32,1225.32 ; v1(560,885) 572.87,885 636.33,821.54 R15.2 ; v1(590,1420) 590,1415.67 596.73,1408.94 R14.2 ; v1(655,1135) 655,1145 680.32,1170.32 U5.8 ; v1(885,1225) 955,1225 985,1195 985,1101.71 960,1076.71 C17.1
  Bottom4 w4: v1(95,440) 100,435 155,435 R6.2@185,405 ; v1(100,545) 100,543.15 130.75,512.4 Q1.3
  other v1: 495,1225
MPU6050_INT: U2.12 U5.41 | length 388.7
  Top1 w4: U2.12 327.81,759.21 333.03,764.43 369.43,764.43 v1(385,780) ; v1(470,865) 471,866 486,866 544.92,924.92 U5.41
  Bottom4 w4: v1(385,780) 405,800 405,821.33 428.67,845 450,845 v1(470,865)
MPU6050_SCL: OLED1.10 R1.2 U1.6 U2.23 U5.42 | length 2423.9
  Top1 w4: U2.23 127.99,680.47 116.48,668.96 116.48,563.52 120,560 148.46,560 v1(150,558.46) ; v1(560,1040) 564.61,1035.39 U5.42
  Sign2 w4: v1(95,225) 149,279 149,557.46 v1(150,558.46) ; v1(495,550) 485,550 460,575 460,795 500,835 500,980 v1(560,1040) 560,1045 420,1185 420,1220 462.5,1262.5 537.5,1262.5 545,1270 545,1430 521,1454 521,1464 v1(500,1485)
  Bottom4 w4: v1(95,225) 99.33,225 103.4,220.93 208.19,220.93 229.97,242.71 239.12,242.71 250,253.59 U1.6 ; v1(150,558.46) 172.18,536.28 172.18,505.16 182.34,495 260,495 270,505 270,530 290,550 v1(495,550) ; v1(500,1485) 515.59,1469.41 OLED1.10
MPU6050_SDA: OLED1.11 R3.1 U1.5 U2.24 U5.43 | length 2375.2
  Top1 w4: U2.24 136.26,587.04 147.03,576.28 192.66,576.28 195,573.93 v1(195,560) ; v1(581.97,1053.03) 583.13,1051.87 583.13,982.5 U5.43 ; v1(195,560) 198.27,556.73 R3.1 200.49,561.24 196.24,561.24 v1(195,560)
  Sign2 w4: v1(133.81,241.19) 195,302.37 v1(195,560) ; v1(470,1485) 494,1509 515,1509 529,1495 529,1461 560,1430 560,1260 550,1250 475,1250 435,1210 435,1181.31 541.31,1075 560,1075 v1(581.97,1053.03) 579.65,1050.71 579.65,1037.03 542.63,1000 542.34,1000 540,997.66 540,840 480,780 480,595 v1(525,550)
  Bottom4 w4: v1(133.81,241.19) 154.99,262.36 U1.5 ; v1(195,560) 197.11,560 246.02,608.91 399.81,608.91 400,608.72 466.28,608.72 v1(525,550) ; v1(470,1485) 470,1479.26 491.18,1458.08 OLED1.11 ; v1@579.65,1050.71 v1(581.97,1053.03)
NetC1_1: C1.1 U2.20 | length 160.6
  Top1 w4: U2.20 127.99,739.53 115,752.52 115,847.66 122.34,855 136.72,855 146.54,864.81 C1.1
NetC9_2: C9.2 U2.10 | length 147
  Top1 w4: U2.10 302.01,719.84 316.85,705 400.75,705 424.02,728.27 C9.2
NetC10_1: C10.1 C11.1 OLED1.14 | length 121.2
  Bottom4 w4: C10.1@310,1441.73 358.27,1441.73 C11.1 413.66,1440 417.96,1435.7 OLED1.14
NetC12_1: C12.1 U6.4 | length 112.9
  Top1 w4: C12.1 607.66,360 610.9,363.24 610.9,389.58 620,398.68 U6.4
NetC13_2: C13.2 OLED1.13 | length 321.3
  Bottom4 w4: C13.2 190,1447.67 189.72,1447.95 189.72,1453.6 190,1453.88 190,1460 210,1480 420.46,1480 442.38,1458.08 OLED1.13
NetC14_2: C14.2 OLED1.9 R18.1 | length 403.2
  Sign2 w4: v1(545,1480) 777.37,1480 787.37,1490 v1(790,1490)
  Bottom4 w4: OLED1.9 544.3,1429.3 544.3,1479.3 v1(545,1480) ; v1(790,1490) 823.46,1490 R18.1 828.27,1488.27 C14.2
NetC15_1: C15.1 OLED1.4 | length 237.8
  Bottom4 w4: OLED1.4 662.05,1458.07 683.96,1479.98 745.74,1479.98 751.73,1474 799.46,1474 827.67,1445.8 828.65,1445.8 838.46,1435.98 C15.1
NetC15_2: C15.2 OLED1.3 | length 190.5
  Bottom4 w4: OLED1.3 686.45,1469.64 688.79,1471.98 742.43,1471.98 748.41,1466 792.8,1466 805,1453.8 C15.2
NetC16_1: C16.1 OLED1.2 | length 76
  Bottom4 w4: OLED1.2 710.87,1352.4 C16.1
NetC16_2: C16.2 OLED1.1 | length 79.8
  Bottom4 w4: OLED1.1 735.25,1362.47 746.73,1350.98 C16.2
NetC17_2: C17.2 U5.5 X1.1 | length 308.4
  Top1 w4: U5.5 805.45,1111.26 819.25,1097.46 846.71,1070 911.54,1070 915.74,1065.8 916.72,1065.8 C17.2@926.54,1055.98 ; C17.2 C17.2@926.54,1055.98 ; X1.1 926.54,1118.64 C17.2@926.54,1055.98
NetC18_2: C18.2 U5.6 X1.3 | length 335.7
  Top1 w4: U5.6 805.94,1130.94 815,1140 815,1180 835,1200 835,1282.9 X1.3 852.8,1374.53 C18.2
NetC19_2: C19.2 R13.1 SW1.1 | length 127.5
  Top1 w4: C19.2 224.49,925 SW1.1 230.51,930 R13.1
NetD1_A: D1.A R10.2 | length 493.8
  Top1 w4: R10.2 349.81,108.08 795.62,108.08 819.02,84.68 D1.A
NetD2_2: D2.2 Q2.3 R12.1 | length 497.9
  Top1 w4: R12.1 565,825 Q2.3 570,819.17 605.34,783.84 695.94,783.84 719.78,760 719.78,747.56 722.12,745.22 782.88,745.22 795,757.34 795,839.47 774.47,860 D2.2
NetM1_1: M1.1 R2.2 | length 85.4
  Bottom4 w4: M1.1@906.38,974.96 M1.1@906.38,979.65 ; M1.1@930,974.96 950.57,974.96 970.23,994.61 970.23,1020.23 R2.2
NetM1_3: M1.3 R5.2 | length 735.8
  Bottom4 w4: M1.3@903.86,820 906.38,817.48 906.38,822.17 919.38,835.17 950.26,835.17 995,879.9 995,1240 1005,1250 1060,1250 1070.53,1260.53 1070.53,1324.47 1055,1340 R5.2
NetM1_16: M1.16 R6.1 | length 206.7
  Bottom4 w4: R6.1@230,396.87 236.45,403.32 236.45,420.37 318.6,502.52 M1.16@331.57,502.52 ; M1.16@311.92,482.87 M1.16@331.57,502.52 ; M1.16@355.2,502.52 M1.16@331.57,502.52
NetM1_18: M1.18 Q1.2 R4.1 R8.2 | length 788.3
  Bottom4 w4: Q1.2 172.63,475 162.63,485 115,485 105,495 105,515 80,540 80,550 130,600 130,807.66 132.34,810 140,810 152.46,797.54 166.91,797.54 228.46,735.98 R4.1 228.46,681.54 R8.2 260,675 275,660 M1.18@331.57,660 ; M1.18@355.2,655.31 M1.18@355.2,660
NetOLED1_12: OLED1.12 R20.1 | length 284.3
  Bottom4 w4: R20.1 250,1385 260,1375 446.52,1375 459.15,1387.63 462.47,1387.63 466.77,1391.93 OLED1.12
NetQ1_1: Q1.1 R7.1 | length 905.1
  Top1 w4: v1(165,460) 167.59,462.59 167.59,476 191.59,500 239.54,500 242.37,502.83 242.37,503.04 250,510.67 v1(250,515)
  Bottom4 w4: R7.1 106.54,976.54 80,950 64.76,950 25,910.24 25,470 35,460 v1(165,460) ; Q1.1 250,539.8 v1(250,515) ; Q1.1@244.97,558.15 Q1.1@249.21,562.4
NetQ2_1: Q2.1 R17.2 | length 66.4
  Top1 w4: R17.2 504.53,761.73 512.08,754.18 520.82,754.18 532.6,742.4 Q2.1
NetQ2_2: Q2.2 R16.1 U6.11 | length 177.8
  Top1 w4: Q2.2 607.4,733.22 619.18,745 R16.1 673.08,735.19 673.08,721.92 720,675 U6.11
NetQ3_1: Q3.1 R16.2 | length 165.3
  Top1 w4: R16.2 696.73,744.02 706.54,734.2 707.53,734.2 714.13,727.6 Q3.1
NetQ3_3: Q3.3 R19.2 | length 71.9
  Top1 w4: R19.2 720.98,821.54 755.79,786.73 Q3.3
NetR9_1: R9.1 U2.9 | length 141.7
  Top1 w4: U2.9 303.91,700.16 310.09,693.97 405.04,693.97 424.02,675 R9.1
NetR17_1: R17.1 U6.12 | length 343
  Top1 w4: R17.1 485.19,728.27 495,718.46 495,615 510,600 655,600 670,615 U6.12
NetR22_2: R22.2 USB1.A5 | length 84.7
  Top1 w4: R22.2 495,314.02 525.78,283.23 USB1.A5
NetR23_2: R23.2 USB1.B5 | length 75.7
  Top1 w4: USB1.B5 643.89,287.91 665,309.02 R23.2
PA0: P2.4 U5.10 | length 1154.2
  Top1 w4: U5.10 763.43,1209.69 773.11,1200 v1(800,1200)
  Sign2 w4: v1(800,1200) 825,1225 825,1335 865,1375 927.66,1375 930,1372.66 930,1240 942,1228 942,1008.82 979.81,971.01 979.81,675.19 1005,650 1005,630 P2.4
PA1: P2.5 U5.11 | length 1077.1
  Top1 w4: U5.11 795.63,1229.37 v1(800,1225)
  Sign2 w4: v1(800,1225) 815,1240 815,1360 850,1395 930,1395 950,1375 950,1012.13 987.81,974.32 987.81,747.19 P2.5
PA4: P2.6 U5.14 | length 1104.7
  Top1 w4: v1(645,1240) 663.03,1258.03 U5.14
  Sign2 w4: v1(645,1240) 680,1275 680,1320 765,1405 945,1405 958,1392 958,1015.44 995.81,977.64 995.81,888.95 1035,849.76 P2.6
PA6: P2.7 U5.16 | length 1098.2
  Top1 w4: v1(585,1245) 597.95,1245 623.66,1270.71 U5.16
  Sign2 w4: v1(585,1245) 585,1273.69 631.31,1320 646.84,1335.53 646.84,1359.47 702.37,1415 955,1415 966,1404 966,1018.76 1035,949.76 P2.7
PA7: P2.8 U5.17 | length 888.6
  Top1 w4: U5.17 603.98,1343.98 612.69,1352.69 626.37,1352.69 v1(628.69,1355)
  Sign2 w4: v1(628.69,1355) 630,1355 700,1425 958.69,1425 974,1409.69 974,1061 P2.8
PA8: P3.6 U5.29 | length 669.8
  Top1 w4: v1(310,1170) 310.32,1170.32 U5.29
  Sign2 w4: P3.6 120,855 120,930 170,980 170,1175 175,1180 250,1180 260,1170 v1(310,1170)
PA13: P4.2 U5.34 | length 1435
  Top1 w4: U5.34 466.89,1071.89 v1(470,1075)
  Sign2 w4: v1(470,1075) 375,1170 375,1252.63 357.63,1270 140,1270 125,1285 125,1440 240,1555 240,1600 290.53,1650.53 704.47,1650.53 P4.2
PA14: P4.3 U5.37 | length 1320.3
  Top1 w4: U5.37 466.18,1021.18 v1(485,1040)
  Sign2 w4: v1(485,1040) 486,1041 486,1094 470,1110 455,1110 385,1180 385,1265 370,1280 150,1280 133,1297 133,1423 284.73,1574.73 549.98,1574.73 590.24,1615 P4.3
PA15: P3.5 U5.38 | length 834.4
  Top1 w4: P3.5 24.17,740.83 22.99,742.01 22.99,930.65 37.34,945 80,945 145,1010 245.04,1010 ; v1(440,980) 440,940 450,930 475,930 485.87,940.87 U5.38
  Sign2 w4: v1(256,1010) v1(393.5,1010)
  Bottom4 w4: v1(393.5,1010) 396.5,1007 413,1007 v1(440,980)
PB0: P2.9 U5.18 | length 1021.7
  Top1 w4: v1(530,1230) 543.58,1230 584.29,1270.71 U5.18
  Sign2 w4: v1(530,1230) 542,1242 553.31,1242 577,1265.69 577,1327 690,1440 955,1440 982,1413 982,1153 P2.9
PB1: P2.10 U5.19 | length 771.8
  Top1 w4: U5.19 564.61,1344.94 567.43,1347.77 568.44,1347.77 575.67,1355 v1(580,1355)
  Sign2 w4: v1(580,1355) 680,1455 955,1455 990,1420 990,1240 1030,1200 P2.10
PB3: P3.4 U5.39 | length 869.6
  Top1 w4: P3.4 100.53,635.53 100.53,945.53 135,980 v1(260,980) ; v1(445.89,912.09) 447.98,910 485,910 505.55,930.55 U5.39
  Sign2 w4: v1(260,980) 310,930 v1(393.5,930)
  Bottom4 w4: v1(393.5,930) 395,930 415,910 443.8,910 v1(445.89,912.09)
PB4: P3.3 U5.40 | length 852.3
  Top1 w4: v1(470,890) 472,888 488,888 525.24,925.24 U5.40
  Bottom4 w4: P3.3 65,546.31 114.28,595.59 114.28,819.28 163.26,868.26 444.98,868.26 466.71,890 v1(470,890)
PB8: P3.2 U5.45 | length 1084.7
  Top1 w4: v1(450,515) 522.37,515 532.37,525 v1(535,525) ; U5.45 623.66,921.34 v1(640,905)
  Sign2 w4: v1(255,360) 334.59,360 450,475.41 v1(450,515) ; v1(535,525) 565,555 565,830 v1(640,905)
  Bottom4 w4: P3.2 105,360 v1(255,360)
PB9: P3.1 U5.46 | length 1115.6
  Top1 w4: v1(495,485) 515,505 v1(550,505) ; U5.46 643.35,953.92 648.45,948.82 649.19,948.82 675,923.01 v1(675,903.38)
  Sign2 w4: v1(260,325) 335,325 v1(495,485) ; v1@550.98,500.98 550.98,501.65 559.14,509.81 559.81,509.81 590,540 590,818.38 v1(675,903.38)
  Bottom4 w4: P3.1 90,325 v1(260,325)
PB12: P3.10 U5.25 | length 371.1
  Top1 w4: v1(355,1250) 355.47,1249.53 414.53,1249.53 U5.25
  Sign2 w4: P3.10 115,1250 v1(355,1250)
PB13: P3.9 U5.26 | length 440.1
  Top1 w4: v1(335,1230) 335.63,1229.37 U5.26
  Sign2 w4: P3.9 110,1145 110,1205 136,1231 334,1231 v1(335,1230)
PB14: P3.8 U5.27 | length 517.4
  Top1 w4: v1(295,1215) 299.33,1215 304.64,1209.69 U5.27
  Sign2 w4: P3.8 125,1060 125,1190 150,1215 v1(295,1215)
PB15: P3.7 U5.28 | length 595.6
  Top1 w4: v1(340,1190) U5.28
  Sign2 w4: P3.7 155,990 155,1190 165,1200 280,1200 290,1190 v1(340,1190)
PC13: P2.1 U5.2 | length 930.2
  Top1 w4: U5.2 802.8,1052.2 835,1020 v1(835,1005)
  Sign2 w4: v1(835,1005) 880,960 880,865 890,855 912.03,855 940,827.03 940,395 P2.1
PC14: P2.2 U5.3 | length 963.5
  Top1 w4: U5.3 808.11,1071.89 v1(810,1070)
  Sign2 w4: v1(810,1070) 860,1120 900,1120 907,1113 907,1017.51 960,964.51 960,475 P2.2
PC15: P2.3 U5.4 | length 1276.2
  Top1 w4: U5.4 788.43,1091.57 v1(790,1090)
  Sign2 w4: v1(790,1090) 840,1140 840,1315 865,1340 912.66,1340 915,1337.66 915,1080 934,1061 934,1001.82 971.81,964.02 971.81,563.19 P2.3
RESET: D2.1 U5.7 | length 414.9
  Top1 w4: U5.7 734.96,1149.56 788.93,1149.56 v1(790,1148.5) ; D2.1 860,866.79 v1(860,1030)
  Sign2 w4: v1(790,1148.5) 788.5,1148.5 774,1134 774,1076 820,1030 v1(860,1030)
STM32_N: R24.2 USB1.B7 | length 157.3
  Top1 w4: USB1.B7 545.47,226.28 553.25,218.5 553.25,217.89 556.76,214.37 566.15,214.37 568.5,212.03 568.5,190 560,181.5 v1(560,180)
  Bottom4 w4: R24.2 568.66,128.46 571,130.81 571,146.48 568.5,148.98 568.5,169.66 560,178.16 v1(560,180)
STM32_P: R25.2 USB1.B6 | length 157.3
  Top1 w4: v1(590,180) 590,181.5 581.5,190 581.5,212.03 583.84,214.37 593.23,214.37 596.75,217.89 596.75,218.5 604.53,226.28 USB1.B6
  Bottom4 w4: v1(590,180) 590,178.16 581.5,169.66 581.5,154.37 584,151.87 584,130.81 586.34,128.46 R25.2
STM32IN_N: R24.1 U5.32 | length 1572
  Top1 w4: v1(305,1110) 307.59,1107.41 318.66,1107.41 319.16,1107.92 380.02,1107.92 383.36,1111.26 U5.32
  Sign2 w4: v1(305,1110) 300.67,1110 294.67,1104 283.62,1104 221,1041.38 221,159 248.15,131.85 510.78,131.85 571,71.63 571,65.33 565,59.33 v1(565,55)
  Bottom4 w4: R24.1 568.66,95 571,92.66 v1@571,55.38
STM32IN_P: R21.2 R25.1 U5.33 | length 1553.3
  Top1 w4: v1(305,1085) 308.8,1085 318.22,1094.41 324.04,1094.41 324.55,1094.92 380.02,1094.92 383.36,1091.57 U5.33
  Sign2 w4: v1(305,1085) 300.67,1085 294.67,1091 289,1091 234,1036 234,164.38 253.54,144.85 516.17,144.85 584,77.01 584,65.33 590,59.33 v1(590,55)
  Bottom4 w4: v1@584,55.38 584,92.66 586.34,95 R25.1
USB_N: U6.6 USB1.A7 | length 252.1
  Top1 w4: USB1.A7 581.5,246.35 581.5,271.65 701.5,391.65 701.5,424.56 703.84,426.9 U6.6
USB_P: U6.5 USB1.A6 | length 252.1
  Top1 w4: USB1.A6 568.5,246.35 568.5,277.03 688.5,397.04 688.5,424.56 686.16,426.9 U6.5
VBUS: F1.1 USB1.A4B9 USB1.B4A9 | length 594.7
  Top1 w20: USB1.A4B9 482.32,241.2 482.32,217.48 488.01,211.79 488.01,189.27 537.29,140 620,140 ; USB1.B4A9 667.68,241.2 667.68,217.48 661.99,211.79 661.99,181.98 620,140 ; F1.1 815,205 750,140 620,140
pads on no net: Designator22.1 Designator23.1 Designator24.1 Designator25.1 M1.2 M1.4 M1.5 M1.6 M1.7 M1.8 M1.9 M1.10 M1.11 M1.12 M1.13 M1.14 M1.17 M1.19 M1.20 OLED1.6 U2.0 U2.2 U2.3 U2.4 U2.5 U2.6 U2.7 U2.14 U2.16 U2.19 U2.21 U2.22 U3.4 U4.5 U4.8 U6.7 U6.8 U6.9 U6.10 U6.13 U6.14 U6.15 USB1. USB1.A8 USB1.B8 X1.2 X1.4
copper on no net:
  other v2: 90,25 995,25 25,55 155,55 930,55 1060,55 25,150 155,150 930,150 1060,150 90,185 995,185 1000,1485 95,1490 935,1515 1065,1515 30,1520 160,1520 935,1610 1065,1610 30,1615 160,1615 1000,1645 95,1650

## Polygon pours and split planes (outlines as drawn)
GND on Top1 "GND_L01_P000" (solid, pour order 0): 0,0 0,1670 1090,1670 1090,0
GND on Sign2 "GND_L02_P001" (solid, pour order 1): 0,0 0,1670 1090,1670 1090,0
GND on Gnd3 "GND_L03_P002" (solid, pour order 2): 0,0 0,1670 1090,1670 1090,0
GND on Bottom4 "GND_L04_P005" (solid, pour order 5): 0,0 0,1670 1090,1670 1090,0

## Keep-outs
Keep-Out Layer:
  rectangle: 395,1515 760,1560
  lines w10: 0,0 1090,0 1090,1672.5 0,1672.5 0,0

## Silkscreen, mask and mechanical layers (free items; w line width, h text height)
Top Overlay:
  text "GND" at 524,1569 h10
  text "CLK" at 624,1569 h10
  text "DIO" at 729,1569 h10
  text "3V3" at 824,1569 h10
  text "GND" at 1019,1434 h10
  text "GND" at 49,1429 h10
  text "3V3" at 54,1344 h10
  text "3V3" at 1019,1344 h10
  text "B12" at 54,1239 h10
  text "B1" at 1024,1239 h10
  text "B13" at 54,1144 h10
  text "B0" at 1024,1144 h10
  text "B14" at 54,1049 h10
  text "A7" at 1029,1044 h10
  text "A6" at 1024,944 h10
  text "B15" at 49,939 h10
  text "A4" at 1024,844 h10
  text "A8" at 49,839 h10
  text "A1" at 1029,744 h10
  text "A15" at 54,739 h10
  text "B3" at 54,644 h10
  text "A0" at 1024,639 h10
  text "C15" at 1024,544 h10
  text "B4" at 49,539 h10
  text "C14" at 1029,444 h10
  text "B8" at 49,439 h10
  text "C13" at 1024,344 h10
  text "B9" at 54,339 h10
Bottom Overlay:
  text "STM32Core V 1.1" at 710,280 h30
Mechanical 1:
  lines w10: 0,0 0,1670 1090,1670 1090,0 0,0 ; 395,1515 760,1515 760,1555 395,1555 395,1515